# Altium PCB Led7_74HC595.PcbDoc
Units mil, origin at the board's own origin, x right, y up, seen from the top; angles counter-clockwise.
Board outline 2559.06 x 1181.1 mil, 2 copper layers (Top Layer, Bottom Layer); 16 components, 32 nets, 93 pads, 16 vias.
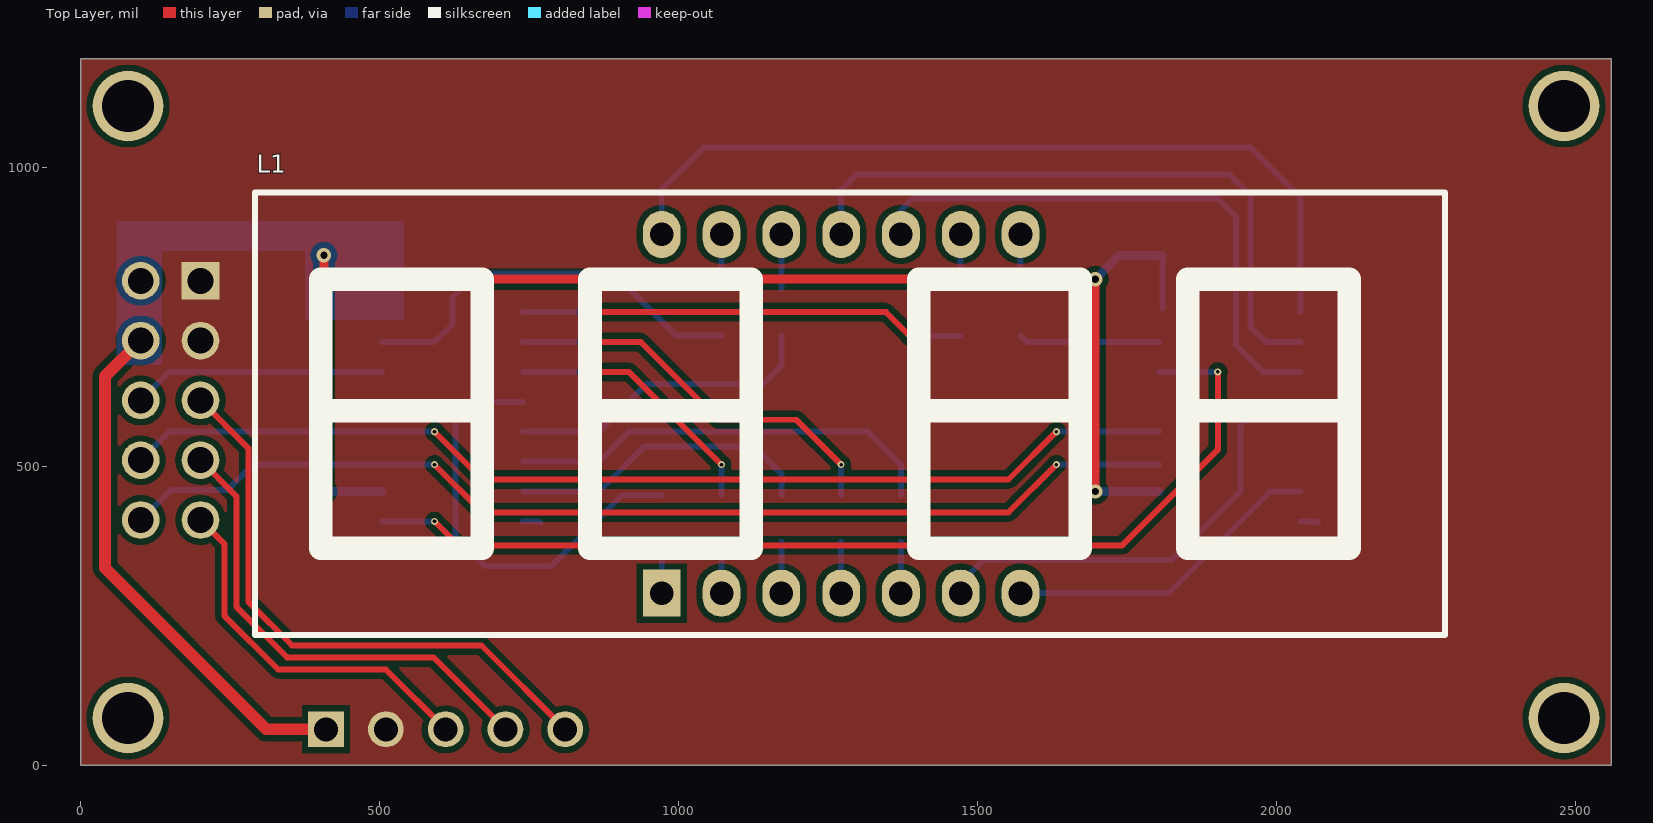
[diagram p0: Top Layer view]
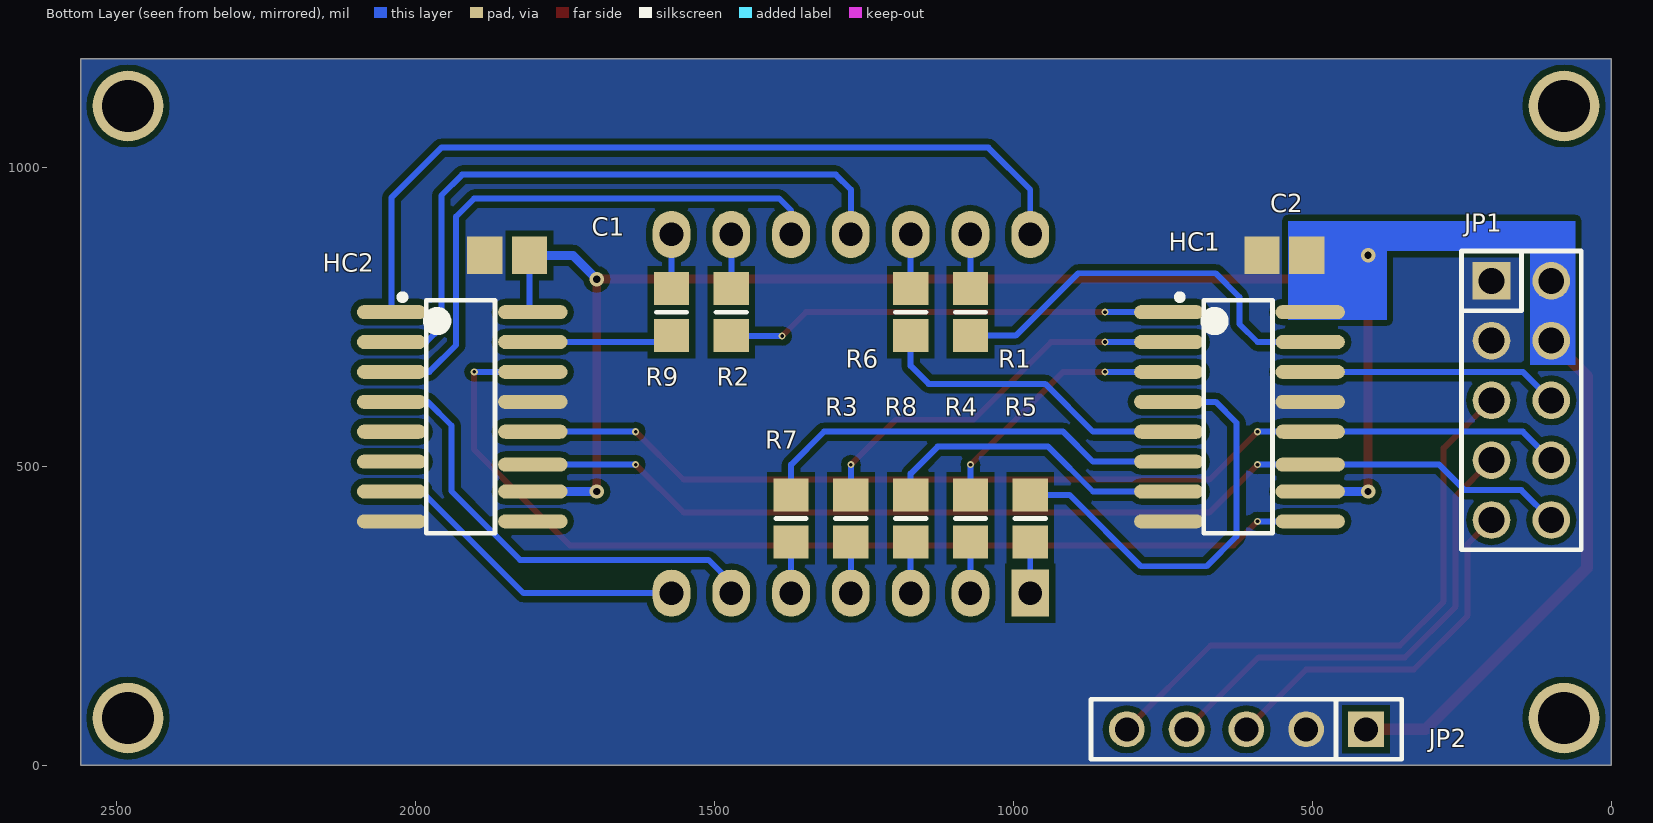
[diagram p1: Bottom Layer view, seen from below]

## Layer stack, top to bottom
Top Solder: solder mask 0.4, Solder Resist, Dk 3.5
Top Layer: signal copper 1.4
Dielectric 1: dielectric 12.6, FR-4, Dk 4.8
Bottom Layer: signal copper 1.4
Bottom Solder: solder mask 0.4, Solder Resist, Dk 3.5

## Board outline
0,0 0,1181.1 2559.06,1181.1 2559.06,0

## Design rules (kind name [scope] priority, off if disabled: settings)
Clearance [All] p1: gap=10
PlaneConnect [All] p1: planeconnectstyle=Direct reliefexpansion=20 reliefentries=4 reliefconductorwidth=10 reliefairgap=10
PolygonConnect [All] p1: connectstyle=Direct reliefconductorwidth=10 reliefentries=4 polygonreliefangle="90 Angle" airgapwidth=10
RoutingVias [All] p1: holewidth=12 width=24 viastyle="Through Hole" minholewidth=6 minwidth=12 maxholewidth=24 maxwidth=48
SolderMaskExpansion [All] p1: expansion=4
Width [All] p1: maxlimit=20 minlimit=10 preferedwidth=15
29 further rules are at their usual default settings.

## Components (designator, comment, footprint, x,y, rotation, side; value= is the part's Value field where it differs from the comment)
C1 "100n Cer" CAPC_0805 1846.38,852.64 r0 bottom
C2 "100n Cer" CAPC_0805 546.38,852.64 r0 bottom
HC1 "74HC595" SOIC_16 621.38,582.64 r180 bottom
HC2 "74HC595" SOIC_16 1921.38,582.64 r180 bottom
JP1 "JP5x2" JP5-D2T 150,610 r270 bottom
JP2 "JP5" JP5-C1T 409.99,60 r0 bottom
L1 "Led 7 Seg 4 digit - Anode" LED7SEG-4-0.56-RG 1291.38,582.64 r0 top
R1 "RC0805FR-07100RL" RESC_0805 1071.38,757.64 r90 bottom
R2 "RC0805FR-07100RL" RESC_0805 1471.38,757.64 r90 bottom
R3 "RC0805FR-07100RL" RESC_0805 1271.38,412.64 r270 bottom
R4 "RC0805FR-07100RL" RESC_0805 1071.38,412.64 r270 bottom
R5 "RC0805FR-07100RL" RESC_0805 971.38,412.64 r270 bottom
R6 "RC0805FR-07100RL" RESC_0805 1171.38,757.64 r90 bottom
R7 "RC0805FR-07100RL" RESC_0805 1371.38,412.64 r270 bottom
R8 "RC0805FR-07100RL" RESC_0805 1171.38,412.64 r270 bottom
R9 "RC0805FR-07100RL" RESC_0805 1571.38,757.64 r90 bottom

## Footprints (in the part's own frame and the unit in brackets; to place one, negate y for a bottom-side part, rotate by r counter-clockwise, add the part's x,y. Pads: shape width x height; smd on the part's side, far side on the other; paste and mask are expansions set on the pad)
CAPC_0805 [mm] "Chip Capacitor, Body 2.0x1.3mm, IPC Low Density"
  rect 1.5x1.6 smd: 1(-0.95,0) 2(0.95,0)
  body extent -1,-0.64 1,0.64, height 0.57
JP5-C1T [mm] "5 row, straight, gold plating"
  rect 1.52x1.52 hole 1.02: 1(0,0)
  round 1.52 hole 1.02: 2(2.54,0) 3(5.08,0) 4(7.62,0) 5(10.16,0)
  silkscreen extent -1.52,-1.27 11.68,1.27, body extent -1.52,-1.25 11.68,1.25, height 8.51
JP5-D2T [mm] "10 pins, dual pin, straight, gold plating"
  rect 1.6x1.6 hole 1.1: 1(-5.08,-1.27)
  round 1.6 hole 1.1: 2(-2.54,-1.27) 3(0,-1.27) 4(2.54,-1.27) 5(5.08,-1.27) 6(5.08,1.27) 7(2.54,1.27) 8(0,1.27) 9(-2.54,1.27) 10(-5.08,1.27)
  silkscreen extent -6.35,-2.54 6.35,2.54, body extent -6.35,-2.54 6.35,2.54, height 8.55
LED7SEG-4-0.56-RG [mil]
  round 60 on Top Overlay: 0(-535,-205) 0(-85,-205) 0(465,-205) 0(915,-205)
  round 118.11 on Top Overlay: 0(-20,-95) 0(-20,155)
  rect 62.99x78.74 hole 39.37: 1(-320,-295)
  oval 62.99x78.74 hole 39.37: 2(-220,-295) 3(-120,-295) 4(-20,-295) 5(80,-295) 6(180,-295) 7(280,-295) 8(280,305) 9(180,305) 10(80,305) 11(-20,305) 12(-120,305) 13(-220,305) 14(-320,305)
  silkscreen extent -1000,-365 990,375, body extent -995,-370 985,378, height 565
RESC_0805 [mm] "Chip Resistor, Body 2.0x1.3mm, IPC Low Density"
  rect 1.4x1.5 smd: 1(-1,0) 2(1,0)
  silkscreen extent 0,-0.65 0,0.65, body extent -1.07,-0.7 1.07,0.7, height 0.65
SOIC_16 [mm]
  oval 2.95x0.6 smd: 1(-3,4.445) 2(-3,3.175) 3(-3,1.905) 4(-3,0.635) 5(-3,-0.635) 6(-3,-1.905) 7(-3,-3.175) 8(-3,-4.445) 9(3,-4.445) 10(3,-3.175) 11(3,-2.032) 12(3,-0.635) 13(3,0.635) 14(3,1.905) 15(3,3.175) 16(3,4.445)
  silkscreen extent -2.66,-4.95 1.4,5.2, body extent -2,-5 2,5, height 1.75

## Part data
C1 C2: library part CAPC0805_104, "CAP CER 0.1UF 25V 10% X7R 0805"
JP1: "WR-PHD 2.54 mm Dual Socket Header"
JP2: "WR-PHD 2.54 mm Angled Socket Header"
L1: library part LED7SEG-4-RG
R1 R2 R3 R4 R5 R6 R7 R8 R9: library part RES0805_100R, "RES SMD 100 OHM 1% 1/8W 0805"

## Free pads (board coordinates)
  round 118.11 hole 86.61: 2(2480.32,1102.36) 3(2480.32,78.74) 4(78.74,1102.36) 5(78.74,78.74)

## Via types
v1: diameter 12, hole 6, Top Layer to Bottom Layer, 12 vias
v2: diameter 24, hole 12, Top Layer to Bottom Layer, 4 vias

## Nets (pads, with @x,y where several pads share a name; then routed paths per layer and width w, separated by ;. In a path a pad name is that pad's centre, name@x,y a point inside that pad or via, vN(x,y) a via of type N, cw(c..) or ccw(c..) an arc to the next point about the centre after c; other vN are vias at no path point)
CLK: HC1.11 HC2.11 JP1.6 | length 1807.9
  Top Layer w10: v1(591.38,502.64) 671.38,422.64 1551.38,422.64 v1(1631.38,502.64)
  Bottom Layer w10: JP1.6 150,460 245,460 287.64,502.64 HC1.11 v1(591.38,502.64) ; v1(1631.38,502.64) HC2.11
DATA: HC1.14 JP1.8 | length 423
  Bottom Layer w10: JP1.8 147.64,657.64 HC1.14
GND: C1.2 C2.2 HC1.8 HC1.13 HC2.8 HC2.13 JP1.1 JP1.2 JP2.2 | length 60.7
  Bottom Layer w10: HC1.8 766.18,407.64 HC1.8@768.78,405.04 ; HC2.8 2066.18,407.64 HC2.8@2068.78,405.04
IO1: JP1.3 JP2.5 | length 988.2
  Top Layer w10: JP1.3 280,530 280,273.28 353.28,200 669.99,200 JP2.5
IO2: JP1.4 JP2.4 | length 804.8
  Top Layer w10: JP1.4 260,450 260,265 345,180 589.99,180 JP2.4
IO3: JP1.5 JP2.3 | length 625.3
  Top Layer w10: JP1.5 240,370 240,250 330,160 509.99,160 JP2.3
LATCH: HC1.12 HC2.12 JP1.7 | length 1789.3
  Top Layer w10: v1(591.38,557.64) 671.38,477.64 1551.38,477.64 v1(1631.38,557.64)
  Bottom Layer w10: JP1.7 147.64,557.64 HC1.12 v1(591.38,557.64) ; v1(1631.38,557.64) HC2.12
NetHC1_1: HC1.1 R2.1 | length 747.8
  Top Layer w10: v1(846.38,757.64) 1346.38,757.64 v1(1386.38,717.64)
  Bottom Layer w10: HC1.1 v1(846.38,757.64) ; v1(1386.38,717.64) R2.1@1470.75,717.64
NetHC1_2: HC1.2 R3.1 | length 667.4
  Top Layer w10: v1(846.38,707.64) 936.38,707.64 1066.38,577.64 1196.38,577.64 v1(1271.38,502.64)
  Bottom Layer w10: HC1.2 v1(846.38,707.64) ; R3.1 v1(1271.38,502.64)
NetHC1_3: HC1.3 R4.1 | length 446.7
  Top Layer w10: v1(846.38,657.64) 916.38,657.64 v1(1071.38,502.64)
  Bottom Layer w10: HC1.3 v1(846.38,657.64) ; R4.1 v1(1071.38,502.64)
NetHC1_4: HC1.4 R5.1 | length 732.8
  Bottom Layer w10: HC1.4 661.38,607.64 626.38,572.64 626.38,382.64 676.38,332.64 786.38,332.64 905.75,452.01 R5.1
NetHC1_5: HC1.5 R6.1 | length 528.1
  Bottom Layer w10: HC1.5 866.38,557.64 946.38,637.64 1141.38,637.64 1171.38,667.64 R6.1
NetHC1_6: HC1.6 R7.1 | length 726
  Bottom Layer w10: HC1.6 866.38,507.64 916.38,557.64 1316.38,557.64 1371.38,502.64 R7.1
NetHC1_7: HC1.7 R8.1 | length 517.2
  Bottom Layer w10: HC1.7 866.38,457.64 941.38,532.64 1126.38,532.64 1171.38,487.64 R8.1
NetHC1_9: HC1.9 HC2.14 | length 1709.1
  Top Layer w10: v1(591.38,407.64) 631.38,367.64 1741.38,367.64 1901.38,527.64 v1(1901.38,657.64)
  Bottom Layer w10: HC1.9 v1(591.38,407.64) ; HC2.14 v1(1901.38,657.64)
NetHC1_15: HC1.15 R1.1 | length 685.3
  Bottom Layer w10: HC1.15 591.38,707.64 621.38,737.64 621.38,782.64 661.38,822.64 891.38,822.64 995.75,718.27 R1.1
NetHC2_1: HC2.1 L1.14 | length 1398.4
  Bottom Layer w10: L1.14 971.38,962.64 1041.38,1032.64 1956.38,1032.64 2039.49,949.53 HC2.1
NetHC2_2: HC2.2 L1.11 | length 1098.3
  Bottom Layer w10: L1.11 1271.38,962.64 1296.38,987.64 1921.38,987.64 1956.38,952.64 1956.38,732.64 1981.38,707.64 HC2.2
NetHC2_3: HC2.3 L1.10 | length 962.5
  Bottom Layer w10: L1.10 1371.38,927.64 1391.38,947.64 1901.38,947.64 1931.38,917.64 1931.38,702.64 1976.38,657.64 HC2.3
NetHC2_4: HC2.4 L1.6 | length 775.3
  Bottom Layer w10: L1.6 1471.38,305.12 1509.37,343.11 1824.37,343.11 1939.37,458.11 1939.37,568.11 1978.9,607.64 HC2.4
NetHC2_7: HC2.7 L1.7 | length 538.5
  Bottom Layer w10: L1.7 1818.9,287.64 1988.9,457.64 HC2.7
NetHC2_15: HC2.15 R9.1 | length 236.3
  Bottom Layer w10: R9.1 1582.01,707.64 HC2.15
NetL1_1: L1.1 R5.2 | length 85.6
  Bottom Layer w10: L1.1 R5.2
NetL1_2: L1.2 R4.2 | length 85.6
  Bottom Layer w10: L1.2 R4.2
NetL1_3: L1.3 R8.2 | length 85.6
  Bottom Layer w10: L1.3 R8.2
NetL1_4: L1.4 R3.2 | length 85.6
  Bottom Layer w10: L1.4 R3.2
NetL1_5: L1.5 R7.2 | length 85.6
  Bottom Layer w10: L1.5 R7.2
NetL1_8: L1.8 R9.2 | length 90.6
  Bottom Layer w10: R9.2 L1.8
NetL1_9: L1.9 R2.2 | length 90.6
  Bottom Layer w10: R2.2 L1.9
NetL1_12: L1.12 R6.2 | length 90.6
  Bottom Layer w10: R6.2 L1.12
NetL1_13: L1.13 R1.2 | length 90.6
  Bottom Layer w10: R1.2 L1.13
VCC: C1.1 C2.1 HC1.10 HC1.16 HC2.10 HC2.16 JP1.9 JP1.10 JP2.1 | length 3548.9
  Top Layer w15: v2(406.38,457.64) 406.38,812.64 ; v2(406.38,852.64) 406.38,812.64 ; v2(1696.38,457.64) v2(1696.38,812.64) 406.38,812.64
  Top Layer w20: JP1.9 40,650 40,330 310,60 JP2.1
  Bottom Layer w10: HC2.16@1808.98,763.35 C1.1
  Bottom Layer w15: v2(406.38,457.64) HC1.10 ; v2(406.38,852.64) C2.1 508.98,763.35 HC1.16 ; v2(1696.38,457.64) HC2.10 ; v2(1696.38,812.64) 1736.38,852.64 C1.1
pads on no net: HC2.5 HC2.6 HC2.9 L1.0

## Polygon pours and split planes (outlines as drawn)
GND on Bottom Layer "Bottom Layer-No Net" (solid, remove dead copper, pour order 0): 0,1181.1 0,0 2559.06,0 2559.06,1181.1
GND on Top Layer "Top Layer-No Net" (solid, remove dead copper, pour order 2): 0,0 0,1181.1 2559.06,1181.1 2559.06,0

## Other copper
Bottom Layer:
  region net VCC: 60,670 60,910 540,910 540,745 375,745 375,860 135,860 135,670